# Altium PCB 补光灯+转接板.PcbDoc
Units mil, origin at the board's own origin, x right, y up, seen from the top; angles counter-clockwise.
Board outline 3157 x 1857 mil, 2 copper layers (Top Layer, Bottom Layer); 13 components, 12 nets, 52 pads, 0 vias.
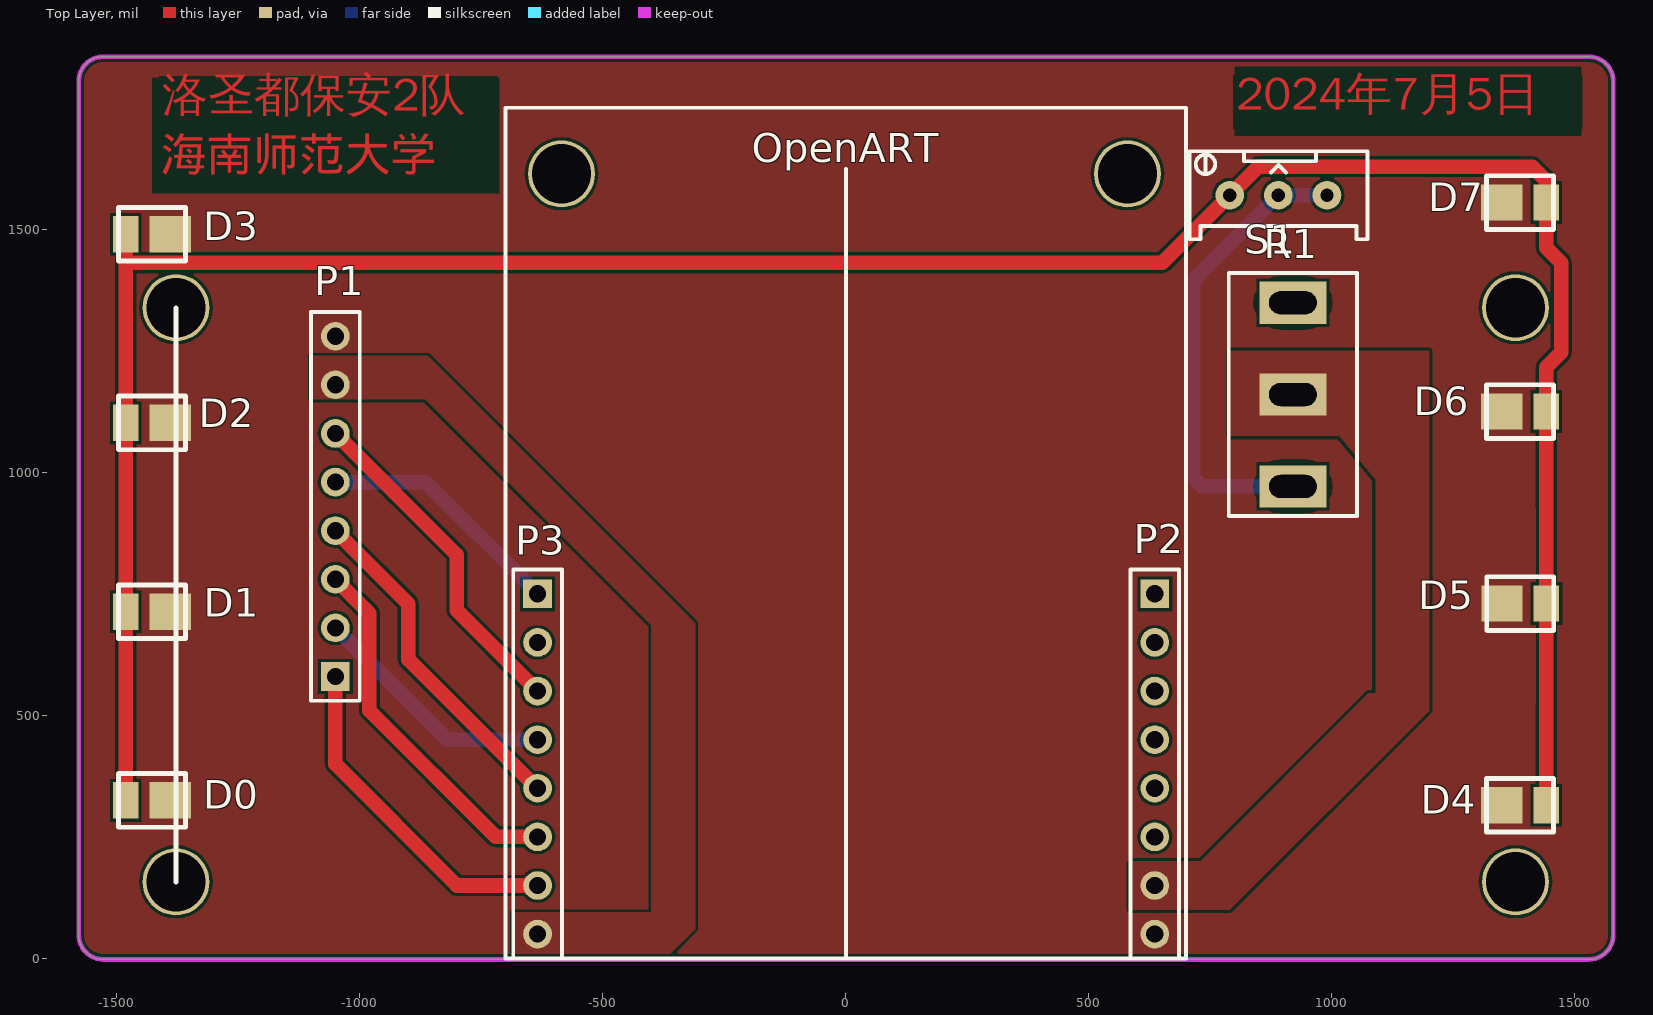
[diagram p0: Top Layer view]
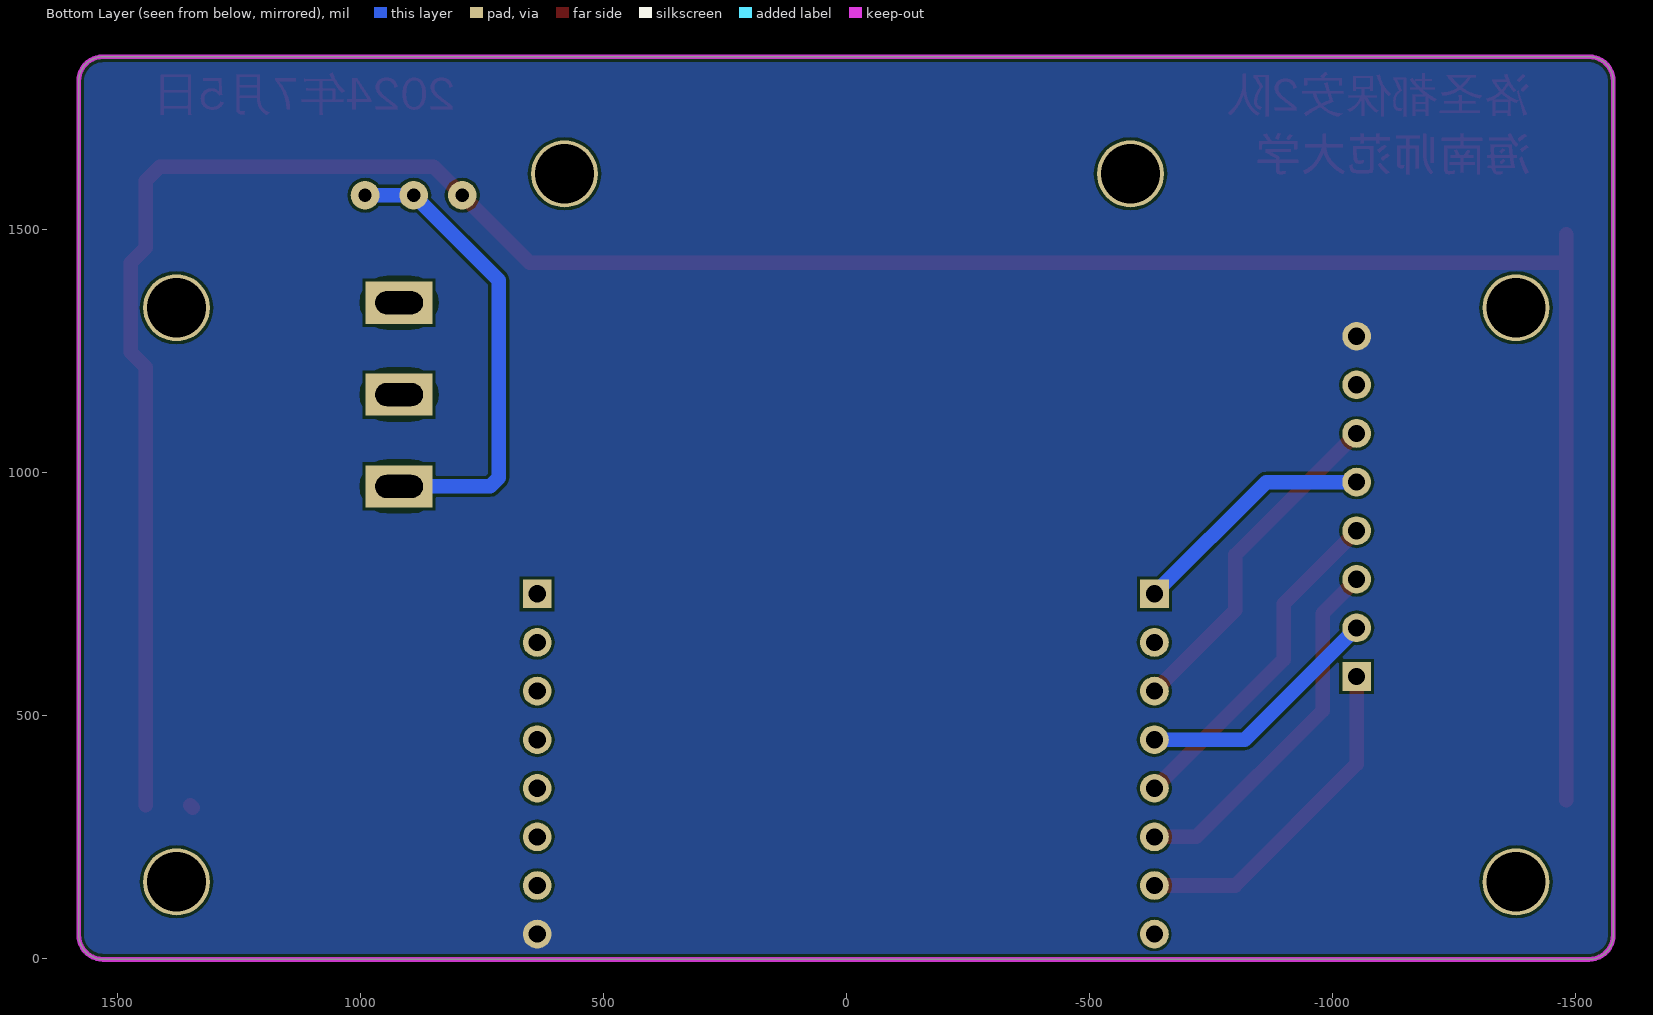
[diagram p1: Bottom Layer view, seen from below]

## Layer stack, top to bottom
Top Solder: solder mask 0.4, Solder Resist, Dk 3.5
Top Layer: signal copper 1.4
Dielectric 1: dielectric 12.6, FR-4, Dk 4.8
Bottom Layer: signal copper 1.4
Bottom Solder: solder mask 0.4, Solder Resist, Dk 3.5

## Board outline
-1528,-2 cw(c-1528,48) -1578,48 -1578,1805 cw(c-1528,1805) -1528,1855 1529,1855 cw(c1529,1805) 1579,1805 1579,48 cw(c1529,48) 1529,-2

## Design rules (kind name [scope] priority, off if disabled: settings)
Clearance [All] p1: gap=6 ignorepadtopadclearanceinfootprint=FALSE
PlaneClearance [All] p1: clearance=10
PlaneConnect [All] p1: planeconnectstyle=Direct reliefexpansion=20 reliefentries=4 reliefconductorwidth=10 reliefairgap=10
PolygonConnect [All] p1: connectstyle=Direct reliefconductorwidth=10 reliefentries=4 polygonreliefangle="90 Angle" airgapwidth=10
RoutingVias [All] p1: holewidth=28 width=50 viastyle="Through Hole" minholewidth=28 minwidth=50 maxholewidth=28 maxwidth=50
SolderMaskExpansion [All] p1: expansion=4 istentingtop=FALSE
UnRoutedNet [All] p1: checkbadconnections=TRUE
Width GND [InNetClass('New Class')] p1: maxlimit=60 minlimit=8 preferedwidth=15
Width [All] p2: maxlimit=30 minlimit=25 preferedwidth=30
27 further rules are at their usual default settings.

## Components (designator, comment, footprint, x,y, rotation, side; value= is the part's Value field where it differs from the comment)
D0 "2835" 2835#1 -1440.49,340 r0 top (schematic designator D？)
D1 "2835" 2835#1 -1440.49,728.33 r0 top (schematic designator D？1)
D2 "2835" 2835#1 -1440.49,1116.67 r0 top (schematic designator D？2)
D3 "2835" 2835#1 -1440.49,1505 r0 top (schematic designator D？3)
D4 "2835" 2835#2 1400,330 r180 top (schematic designator D？4)
D5 "2835" 2835#2 1400.49,745 r180 top (schematic designator D？5)
D6 "2835" 2835#2 1400,1140 r180 top (schematic designator D？6)
D7 "2835" 2835#2 1400,1570 r180 top (schematic designator D？7)
P1 "Header 8" HDR1X8 -1050,580 r90 top
P2 "Header 8" HDR1X8 635.87,750 r270 top
P3 "Header 8" HDR1X8 -633.97,750 r270 top
R1 "50K" RESPOT3296W 890,1570 r0 top
S1 "SW-SPDT" SS12D10 920,1160 r90 top

## Footprints (in the part's own frame and the unit in brackets; to place one, negate y for a bottom-side part, rotate by r counter-clockwise, add the part's x,y. Pads: shape width x height; smd on the part's side, far side on the other; paste and mask are expansions set on the pad)
2835#1 [mm] "2835灯珠"
  rect 1.33x1.9 smd: 1(-1.041,-0.381)
  rect 2.16x1.9 smd: 2(1.283,-0.381)
  silkscreen extent -1.42,-1.78 2.08,1.02
2835#2 [mm] "2835灯珠"
  rect 1.33x1.9 smd: 1(-1.041,0.381)
  rect 2.16x1.9 smd: 2(1.283,0.381)
  silkscreen extent -1.42,-1.02 2.08,1.78
HDR1X8 [mm] "Connector; Header; 8 Position"
  rect 1.5x1.5 hole 0.9: 1(0,0)
  round 1.5 hole 0.9: 2(2.54,0) 3(5.08,0) 4(7.62,0) 5(10.16,0) 6(12.7,0) 7(15.24,0) 8(17.78,0)
  silkscreen extent -1.27,-1.27 19.05,1.27
RESPOT3296W [mm] "Axial Device, Thru-Hole; 2 Leads; 0.4 in Pin Spacing"
  round 1.5 hole 0.7: 1(-2.54,0) 2(2.54,0) ADJ(0,0)
  silkscreen extent -4.65,-2.3 4.65,2.3, body extent -4.75,-2.4 4.75,2.4, height 3.1
SS12D10 [mm]
  rect 2.2x3.5 hole 2.5 slot 1.2 at 0 deg mask+0.07: 1(-4.8,0) 2(0,0) 3(4.8,0)
  silkscreen extent -6.35,-3.35 6.35,3.35, body extent -6.4,-3.3 6.35,3.8, height 12.5

## Part data
D0 D1 D2 D3 D4 D5 D6 D7: library part LED, "2835灯珠"
P1 P2 P3: "Header, 8-Pin", LatestRevisionDate=17-Jul-2002, LatestRevisionNote="Re-released for DXP Platform.", Publisher="Altium Limited"
R1: library part Res-Adj-3p, "可调电阻"
S1: "单刀双掷开关 3脚船型、钮子、拨动开关 SPDT Subminiature Toggle Switch", Price(RMB)=0.000, Published=24-Mar-1999, Publisher="Altium Limited"

## Free pads (board coordinates)
  round 137.8 hole 122.05: 1(-584.76,1614.17) 2(579.61,1614.17) 3(-1377.95,1338.58) 4(1377.95,1338.58) 5(1377.95,157.48) 6(-1377.95,157.48)

## Nets (pads, with @x,y where several pads share a name; then routed paths per layer and width w, separated by ;. In a path a pad name is that pad's centre, name@x,y a point inside that pad or via, vN(x,y) a via of type N, cw(c..) or ccw(c..) an arc to the next point about the centre after c; other vN are vias at no path point)
3V3: P1.7 P3.8
5V: P2.7 S1.2
B0: P1.6 P3.3 | length 702.3
  Top Layer w30: P1.6 -799.93,829.93 -799.93,715.96 P3.3
B1: P1.5 P3.1 | length 511.3
  Bottom Layer w30: P1.5 -863.97,980 P3.1
B2: P3.2
B3: P1.2 P3.4 | length 511.3
  Bottom Layer w30: P1.2 -820,450 P3.4
B12: P1.4 P3.5 | length 702.9
  Top Layer w30: P1.4 -900,730 -900,615 -635,350 P3.5
B13: P1.3 P3.6 | length 752.7
  Top Layer w30: P1.3 -980,710 -980,510 -720,250 P3.6
B16: P1.1 P3.7 | length 699.6
  Top Layer w30: P1.1 -1050,400 -800,150 P3.7
GND: D0.2 D1.2 D2.2 D3.2 D4.2 D5.2 D6.2 D7.2 P1.8 P2.8 | length 7.1
  Top Layer w30: D4.2@1344.51,310 D4.2
NetD？1_1: D0.1 D1.1 D2.1 D3.1 D4.1 D5.1 D6.1 D7.1 R1.1 | length 5492.6
  Top Layer w30: D0.1 D1.1 D2.1 -1481.48,1431 ; D3.1 -1481.48,1431 ; D4.1 1440.99,522 1441.48,522.49 D5.1 1441.48,927 1440.99,927.49 D6.1 1440.99,1216 1472.07,1247.08 1472.07,1431 1440.99,1462.08 D7.1 1440.99,1600 1411.99,1629 849,1629 R1.1 651,1431 -1481.48,1431
NetR1_2: R1.2 R1.ADJ S1.1 | length 966.2
  Bottom Layer w30: S1.1 732.57,971.02 715,988.6 715,1395 R1.ADJ R1.2
pads on no net: P2.1 P2.2 P2.3 P2.4 P2.5 P2.6 S1.3

## Polygon pours and split planes (outlines as drawn)
GND on Top Layer "GND_L01_P026" (solid, remove dead copper, pour order 26): -1835,2095 -1835,-215 1915,-215 1915,2105
3V3 on Top Layer "3V3_L01_P025" (solid, remove dead copper, pour order 25): -1100,1150 -865,1150 -400,685 -400,95 -685,95 -685,5 -365,5 -310,60 -310,690 -860,1240 -1100,1240
5V on Top Layer "5V_L01_P024" (solid, remove dead copper, pour order 24): 590,200 585,195 585,100 790,100 1200,510 1200,1250 790,1250 790,1075 1015,1075 1090,985 1090,970 1090,545 1075,545 730,200
GND on Bottom Layer "GND_L02_P027" (solid, remove dead copper, pour order 27): -1665,1985 -1665,-260 1760,-260 1760,1990

## Keep-outs
Keep-Out Layer:
  lines w10: -1578,48 ccw(c-1528,48) -1528,-2 1529,-2 ccw(c1529,48) 1579,48 1579,1805 ccw(c1529,1805) 1529,1855 -1443,1855 -1528,1855 ccw(c-1528,1805) -1578,1805 -1578,48

## Other copper
Top Layer:
  pour cut-out: 800,1834 801,1834 1513,1834 1513,1692 800,1692
  pour cut-out: -1427,1812 -713,1812 -713,1577 -713,1574 -718,1574 -1427,1574
  text "2024年7月5日" at 802.93,1723.7 h118.11
  text "洛圣都保安2队" at -1405.93,1721.7 h118.11
  text "海南师范大学" at -1409,1597.7 h118.11

## Silkscreen, mask and mechanical layers (free items; w line width, h text height)
Top Overlay:
  lines w8: 0.87,0 0.87,1624 ; -700,0 -700,1750 700,1750 700,0 -700,0
  lines w10: -1377.95,157.48 -1377.95,1338.58
  text "OpenART" at -193,1637.99 h60
Top Solder:
  rectangle: 799,1687 1514,1835
  region: -1422.75,1803 -715,1803 -715,1577 -1422.75,1577
Mechanical 1:
  lines w10: -1577,47 ccw(c-1527,47) -1527,-3 1529,-3 ccw(c1529,47) 1579,47 1579,1804 ccw(c1529,1804) 1529,1854 -1469,1854 -1527,1854 ccw(c-1527,1804) -1577,1804 -1577,47

## Dimensions
-700,1750 to 700,1750 on Mechanical 1
1496.93,0 to 700,1750 on Mechanical 1